# Altium PCB PCB.PcbDoc
Units mm, origin at the board's own origin, x right, y up, seen from the top; angles counter-clockwise.
Board outline 13.46 x 20.32 mm, 2 copper layers (Top Layer, Bottom Layer); 4 components, 16 nets, 48 pads, 0 vias.
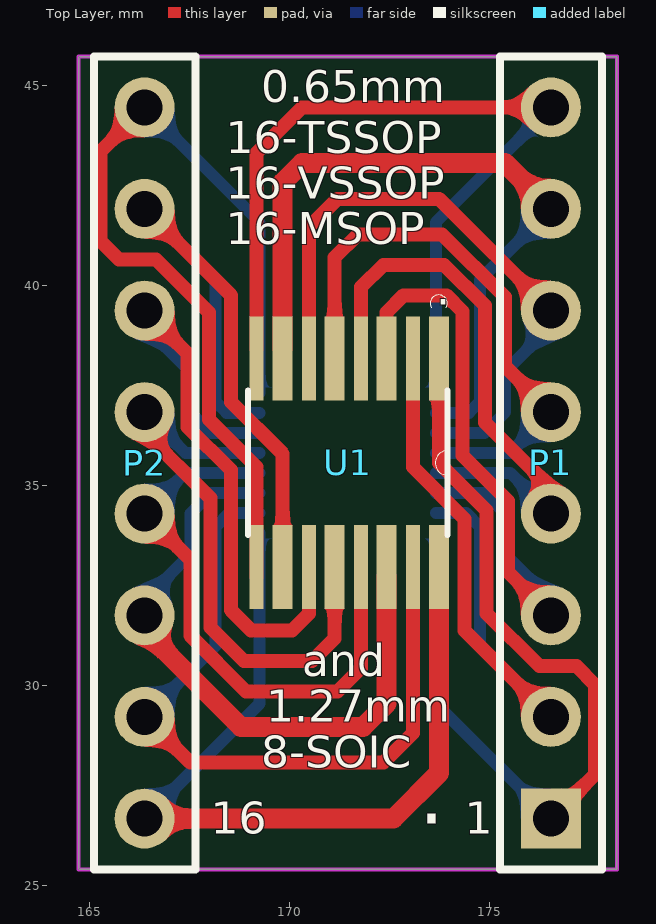
[diagram p0: Top Layer view]
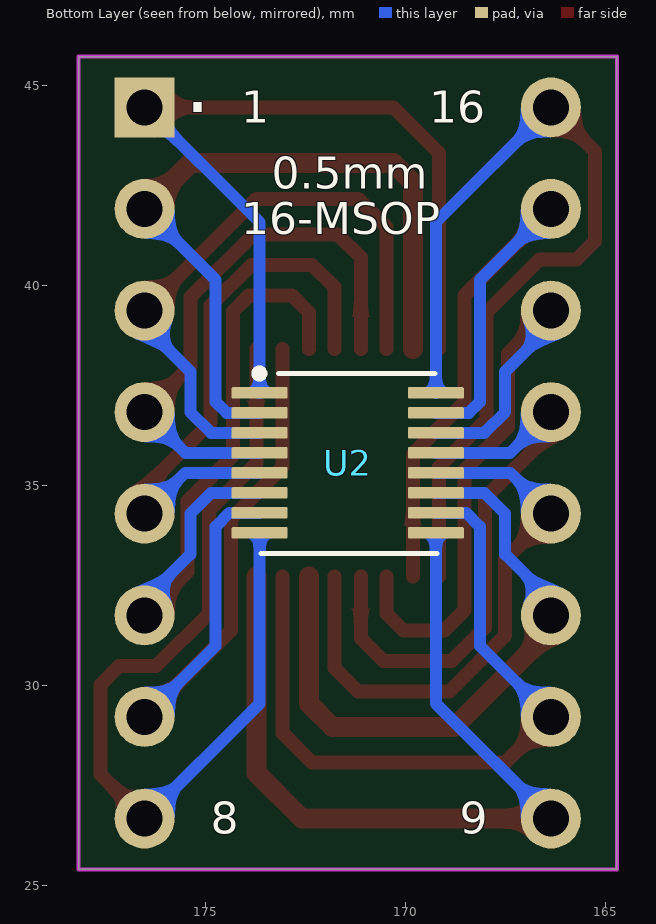
[diagram p1: Bottom Layer view, seen from below]

## Layer stack, top to bottom
Top Solder: solder mask 0.0102, Solder Resist, Dk 3.5
Top Layer: signal copper 0.0356
Dielectric 1: dielectric 0.32, FR-4, Dk 4.8
Bottom Layer: signal copper 0.0356
Bottom Solder: solder mask 0.0102, Solder Resist, Dk 3.5

## Board outline
164.719,45.72 178.181,45.72 178.181,25.4 164.719,25.4

## Design rules (kind name [scope] priority, off if disabled: settings)
Clearance [All] p1: gap=0.152 ignorepadtopadclearanceinfootprint=FALSE except(0: Arc-Hole Track-Hole SMDPad-Hole THPad-Hole Via-Hole Fill-Hole Poly-Hole Region-Hole Text-Hole)
HoleSize [All] p1: absolutevalues=TRUE maxlimit=6.2 minlimit=0.3 maxpercent=80.000 minpercent=20.000
MinimumSolderMaskSliver [All] p1: minsoldermaskwidth=0.1
PolygonConnect ViaConnect [IsVia] p1: connectstyle=Direct reliefconductorwidth=0.254 reliefentries=4 polygonreliefangle="90 Angle" airgapwidth=0.254
PolygonConnect [All] p2: connectstyle=Relief reliefconductorwidth=0.254 reliefentries=4 polygonreliefangle="90 Angle" airgapwidth=0.254
RoutingVias [All] p1: holewidth=0.3 width=0.6 viastyle="Through Hole" minholewidth=0.3 minwidth=0.5 maxholewidth=1 maxwidth=5
SilkToSilkClearance [All] p1: silktosilkclearance=0.1
SilkToSolderMaskClearance [IsPad] p1: minsilkscreentomaskgap=0.1 clearancetoexposedcopper=TRUE
SolderMaskExpansion [All] p1: expansion=0.051 istentingtop=FALSE
Width [All] p1: maxlimit=25.4 minlimit=0.15 preferedwidth=0.3
26 further rules are at their usual default settings.

## Components (designator, comment, footprint, x,y, rotation, side; value= is the part's Value field where it differs from the comment)
P1 "" HDR1X8#1 176.53,26.67 r90 top locked
P2 "" HDR1X8#2 166.37,44.45 r270 top
U1 "ADC128S052CIMT" TSSOP/VSSOP/MSOP-0.65mm-16,SOIC-8 171.45,35.56 r270 top
U2 "ADC128S052CIMT" MSOP-0.5mmPitch-16N-3mmBody-1.1mm 171.45,35.56 r180 bottom

## Footprints (in the part's own frame and the unit in brackets; to place one, negate y for a bottom-side part, rotate by r counter-clockwise, add the part's x,y. Pads: shape width x height; smd on the part's side, far side on the other; paste and mask are expansions set on the pad)
HDR1X8#1 [mm] "Connector; Header; 8 Position"
  rect 1.5x1.5 / inner rect 1.5x1.5 / far side round 1.5 hole 0.9: 1(0,0)
  round 1.5 hole 0.9: 2(2.54,0) 3(5.08,0) 4(7.62,0) 5(10.16,0) 6(12.7,0) 7(15.24,0)
  round 1.5 / inner round 1.5 / far side rect 1.5x1.5 hole 0.9: 8(17.78,0)
  silkscreen extent -1.27,-1.27 19.05,1.27
HDR1X8#2 [mm] "Connector; Header; 8 Position"
  round 1.5 / inner rect 1.5x1.5 / far side round 1.5 hole 0.9: 1(0,0)
  round 1.5 hole 0.9: 2(2.54,0) 3(5.08,0) 4(7.62,0) 5(10.16,0) 6(12.7,0) 7(15.24,0) 8(17.78,0)
  silkscreen extent -1.27,-1.27 19.05,1.27
MSOP-0.5mmPitch-16N-3mmBody-1.1mm [mm] "MSOP, 16 pin, 0.5mm pitch, 3mm wide, nominal pads, 1.1mm high"
  rrect25% 1.4x0.29 smd mask+0.051: 1(-2.204,1.75) 2(-2.204,1.25) 3(-2.204,0.75) 4(-2.204,0.25) 5(-2.204,-0.25) 6(-2.204,-0.75) 7(-2.204,-1.25) 8(-2.204,-1.75) 9(2.203,-1.75) 10(2.203,-1.25) 11(2.203,-0.75) 12(2.203,-0.25) 13(2.203,0.25) 14(2.203,0.75) 15(2.203,1.25) 16(2.203,1.75)
  silkscreen extent -2.31,-2.26 2.24,2.34, body extent -2.45,-2.25 2.45,2.25, height 1.1
TSSOP/VSSOP/MSOP-0.65mm-16,SOIC-8 [mm] "TSSOP/VSSOP/MSOP-0.65mm 16-pin,  or SOIC-8"
  rect 2.1x0.5 smd mask+0.05: 1(-2.605,2.286) 3(-2.605,0.965) 5(-2.605,-0.33) 7(-2.605,-1.626) 10(2.605,-1.626) 12(2.605,-0.33) 14(2.605,0.965) 16(2.605,2.286)
  rect 2.1x0.35 smd mask+0.05: 2(-2.605,1.626) 4(-2.605,0.33) 6(-2.605,-0.965) 8(-2.605,-2.286) 9(2.605,-2.286) 11(2.605,-0.965) 13(2.605,0.33) 15(2.605,1.626)
  silkscreen extent -4.2,-2.49 1.8,2.49, body extent -3.2,-2.5 3.2,2.79, height 1.75

## Part data
P1 P2: library part "Header 8", "Header, 8-Pin", LatestRevisionDate=17-Jul-2002, LatestRevisionNote="Re-released for DXP Platform.", Publisher="Altium Limited"
U1 U2: "8-Channel 12-Bit ADC", Package="TSSOP-16 Texas Instruments", Availability=Unavailable, MF="Texas Instruments", MP=ADC128S052CIMT/NOPB, Price=None, SnapEDA_Link=https://www.snapeda.com/parts/ADC128S052CIMT/NOPB/Texas%20Instruments/view-part/?ref=snap

## Nets (pads, with @x,y where several pads share a name; then routed paths per layer and width w, separated by ;. In a path a pad name is that pad's centre, name@x,y a point inside that pad or via, vN(x,y) a via of type N, cw(c..) or ccw(c..) an arc to the next point about the centre after c; other vN are vias at no path point)
1: P1.1 U1.1 U2.8 | length 22.7
  Top Layer w0.35: U1.1@173.736,38.405 U1.1 173.736,35.56 174.923,34.373 174.923,31.798 176.241,30.48 177.165,30.48 177.632,30.013 177.632,27.772 P1.1
  Bottom Layer w0.3: U2.8 173.654,29.546 P1.1
2: P1.2 U1.2 U2.7 | length 17.4
  Top Layer w0.35: U1.2@173.076,38.405 U1.2 173.076,35.458 174.371,34.163 174.371,31.369 P1.2
  Bottom Layer w0.3: U2.7 174.409,34.31 174.752,33.967 174.752,30.988 P1.2
3: P1.3 U1.3 U2.6 | length 16.6
  Top Layer w0.35: U1.3@172.415,38.405 172.415,39.319 172.847,39.751 173.913,39.751 174.313,39.351 174.313,35.745 175.453,34.605 175.453,32.827 P1.3
  Bottom Layer w0.3: U2.6 174.867,34.81 175.387,34.29 175.387,33.274 176.53,32.131 P1.3
4: P1.4 U1.4 U2.5 | length 14.5
  Top Layer w0.35: U1.4@171.78,38.405 171.78,39.954 172.339,40.513 173.862,40.513 174.878,39.497 174.878,39.477 174.885,39.471 174.885,36.57 176.53,34.925 P1.4
  Bottom Layer w0.3: U2.5 175.51,35.31 P1.4
5: P1.5 U1.5 U2.4 | length 14.1
  Top Layer w0.35: U1.5@171.12,38.405 171.12,40.691 171.704,41.275 173.81,41.275 175.38,39.705 175.38,39.686 175.387,39.679 175.387,37.973 P1.5
  Bottom Layer w0.3: U2.4 175.51,35.81 P1.5
6: P1.6 U1.6 U2.3 | length 15.5
  Top Layer w0.35: U1.6@170.485,38.405 170.485,41.453 171.196,42.164 173.736,42.164 P1.6
  Bottom Layer w0.3: U2.3 174.867,36.31 175.387,36.83 175.387,37.846 176.53,38.989 P1.6
7: P1.7 U1.7 U2.2 | length 18.3
  Top Layer w0.5: U1.7@169.824,38.405 169.824,42.57 170.307,43.053 175.387,43.053 P1.7
  Bottom Layer w0.3: U2.2 174.478,36.81 174.752,37.084 174.752,40.132 P1.7
8: P1.8 U1.8 U2.1 | length 21.1
  Top Layer w0.35: U1.8@169.164,38.405 169.164,43.307 170.307,44.45 P1.8
  Bottom Layer w0.3: U2.1 173.654,41.574 P1.8
9: P2.1 U1.9 U2.16 | length 22.7
  Top Layer w0.35: P2.1 165.268,43.348 165.268,41.107 165.735,40.64 166.659,40.64 167.977,39.322 167.977,36.644 169.164,35.457 U1.9 U1.9@169.164,32.715
  Bottom Layer w0.3: P2.1 169.247,41.574 U2.16
10: P2.2 U1.10 U2.15 | length 17.4
  Top Layer w0.35: P2.2 168.529,39.751 168.529,37.084 169.824,35.789 U1.10 U1.10@169.824,32.715
  Bottom Layer w0.3: P2.2 168.148,40.132 168.148,37.084 168.422,36.81 U2.15
11: P2.3 U1.11 U2.14 | length 16.6
  Top Layer w0.35: P2.3 167.447,38.293 167.447,36.463 168.529,35.381 168.529,31.877 169.037,31.369 170.053,31.369 170.485,31.801 U1.11@170.485,32.715
  Bottom Layer w0.3: P2.3 166.37,38.989 167.513,37.846 167.513,36.83 168.033,36.31 U2.14@169.246,36.31
12: P2.4 U1.12 U2.13 | length 14.6
  Top Layer w0.35: P2.4 166.37,36.322 168.015,34.677 168.015,31.45 168.858,30.607 170.561,30.607 171.12,31.166 U1.12@171.12,32.715
  Bottom Layer w0.3: P2.4 167.39,35.81 U2.13@169.246,35.81
13: P2.5 U1.13 U2.12 | length 14.2
  Top Layer w0.35: P2.5 167.513,33.147 167.513,31.242 168.91,29.845 171.196,29.845 171.78,30.429 U1.13@171.78,32.715
  Bottom Layer w0.3: P2.5 167.39,35.31 U2.12@169.246,35.31
14: P2.6 U1.14 U2.11 | length 15.8
  Top Layer w0.5: P2.6 166.37,31.369 168.783,28.956 171.831,28.956 172.415,29.54 U1.14@172.415,32.715
  Bottom Layer w0.3: P2.6 166.37,32.131 167.513,33.274 167.513,34.29 168.033,34.81 U2.11
15: P2.7 U1.15 U2.10 | length 18.1
  Top Layer w0.35: P2.7 167.513,28.067 172.339,28.067 173.076,28.804 U1.15@173.076,32.715
  Bottom Layer w0.3: P2.7 168.148,30.988 168.148,33.967 168.491,34.31 U2.10
16: P2.8 U1.16 U2.9 | length 21.1
  Top Layer w0.5: P2.8 172.593,26.67 173.736,27.813 U1.16@173.736,32.715
  Bottom Layer w0.3: P2.8 169.247,29.546 U2.9

## Keep-outs
Keep-Out Layer:
  the board outline again, w0.1

## Silkscreen, mask and mechanical layers (free items; w line width, h text height)
Top Overlay:
  text "0.65mm" at 169.291,44.577 h0.8
  text "16-TSSOP" at 168.402,43.307 h0.8
  text "16-VSSOP" at 168.402,42.164 h0.8
  text "16-MSOP" at 168.402,41.021 h0.8
  text "." at 173.66,39.51 h0.8
  text "and" at 170.307,30.226 h0.8
  text "1.27mm" at 169.418,29.083 h0.8
  text "8-SOIC" at 169.291,27.94 h0.8
  text "." at 173.228,26.543 h1.5
  text "16" at 168.021,26.289 h0.8
  text "1" at 174.371,26.289 h0.8
Bottom Overlay:
  text "." at 174.879,44.323 h1.5
  text "16" at 169.418,44.069 h0.8
  text "1" at 174.117,44.069 h0.8
  text "0.5mm" at 173.355,42.418 h0.8
  text "16-MSOP" at 174.117,41.275 h0.8
  text "9" at 168.656,26.289 h0.8
  text "8" at 174.879,26.289 h0.8